# EAGLE board NE602-Upconverter (EAGLE 7.7.0)
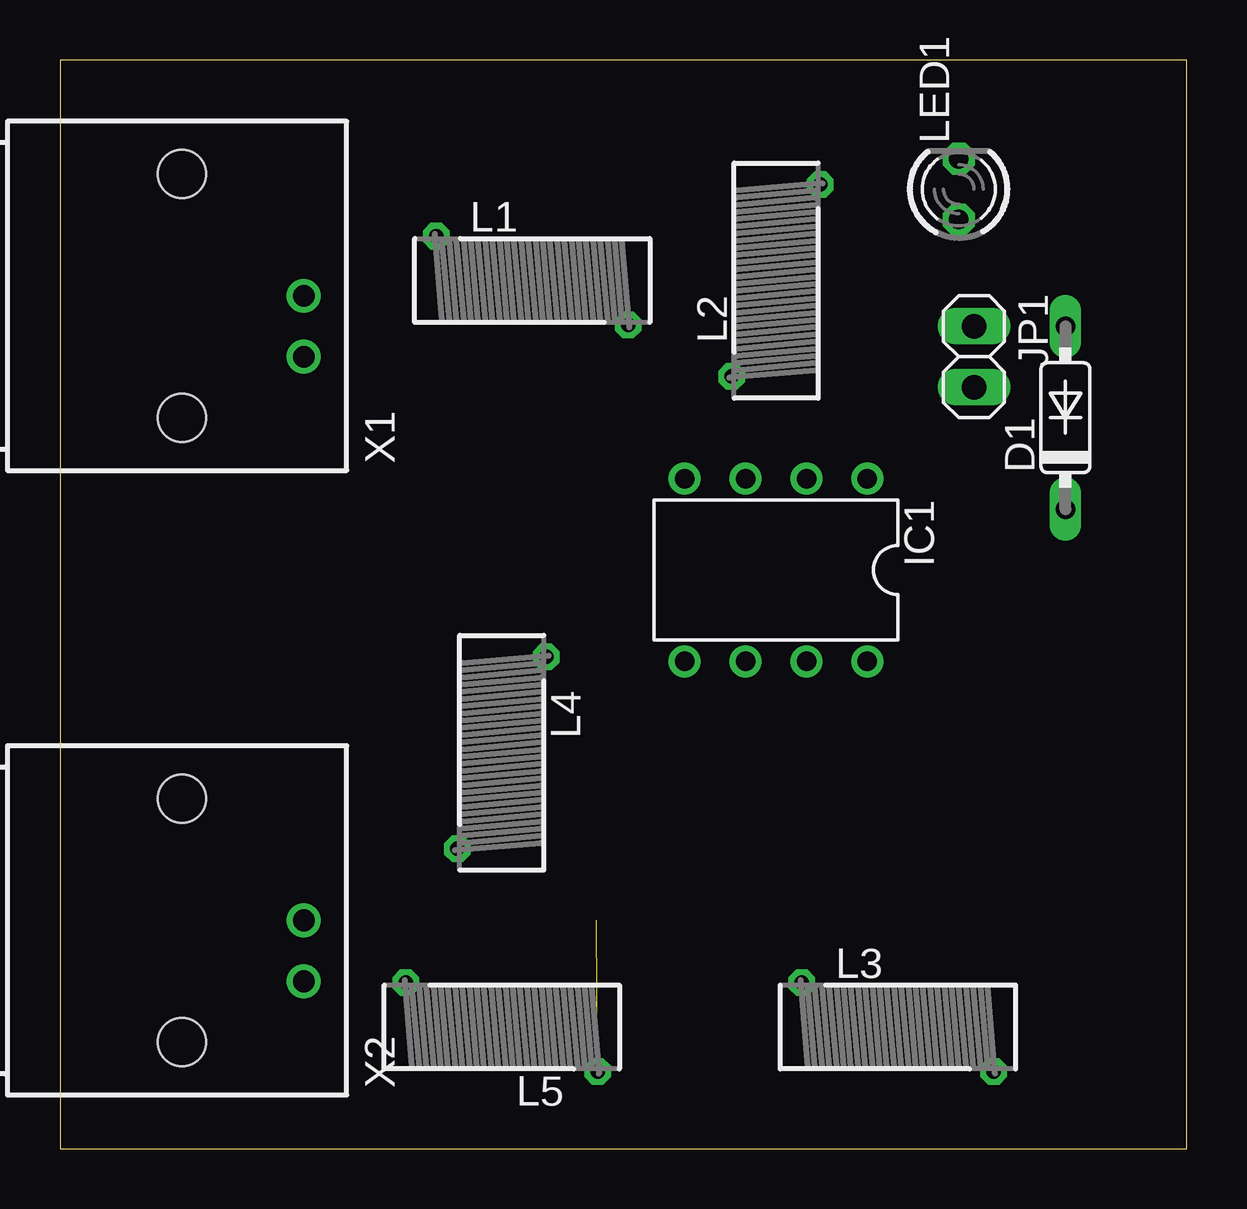
[diagram p0: board, top side]
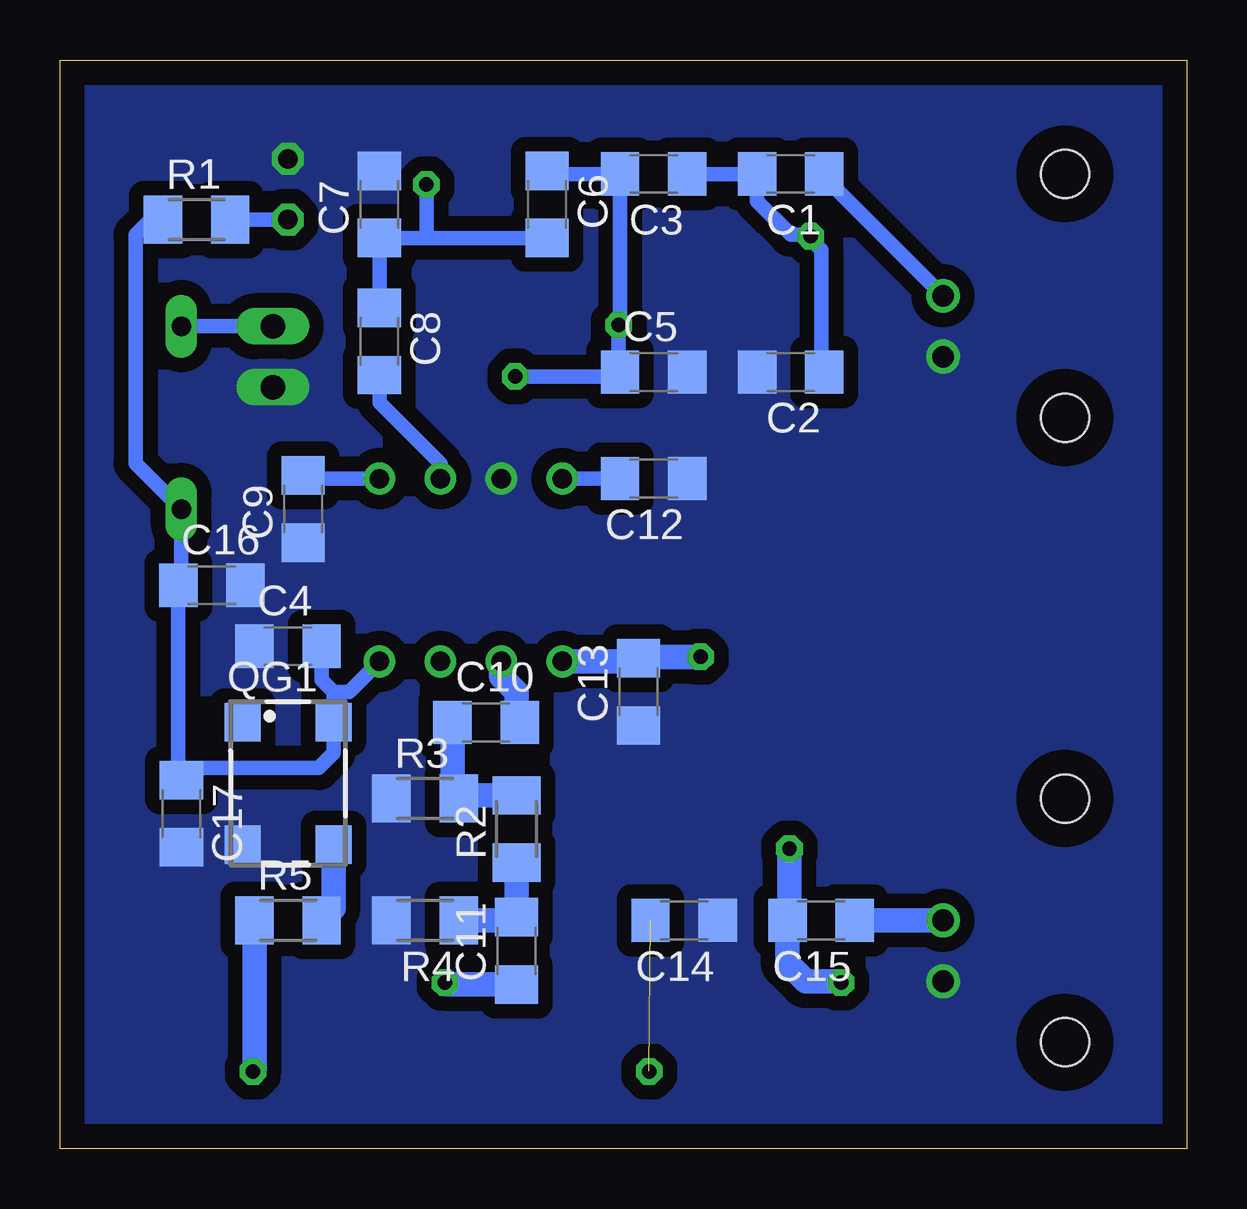
[diagram p1: board, bottom side, seen from below]

Size 46.97 x 45.39 mm. Coordinates in mm from the lower left corner, seen from the top.
Outline: 0,0 46.97,0 46.97,45.39 0,45.39 0,0
Copper layers (1*16): Top 0.035mm / dielectric 1.5mm / Bottom 0.035mm
Design rules "default": minimum track width 10mil, minimum drill 24mil, track to track 8mil, track to pad 8mil, pad to pad 8mil, via to via 8mil, smd to smd 8mil, copper to edge 40mil, drill to drill 8mil, minimum pad ring 10mil, minimum via ring 8mil, stop-mask expansion 4mil, vias tented up to drill 0mil, thermal gap 10mil

## Footprints (pad centres in the part's own frame; a part is rotated, then mirrored left to right if it is on the bottom)
C1206 = smd 1.6 x 1.8: 1 -1.4,0; 2 1.4,0
DO35-7 = drill 0.813 long: A 3.81,0; C -3.81,0
DIL08 = drill 0.813 pad 1.27: 1 -3.81,-3.81; 2 -1.27,-3.81; 3 1.27,-3.81; 4 3.81,-3.81; 5 3.81,3.81; 6 1.27,3.81; 7 -1.27,3.81; 8 -3.81,3.81
1X02 = drill 1.016 long: 1 -1.27,0; 2 1.27,0
Z28/7 = drill 0.6 octagon: 1 4,-1.85; 2 -4,1.85
LED3MM = drill 0.813 octagon: A -1.27,0; K 1.27,0
SM77H = smd 1.6 x 1.5: 1 -2.55,-1.9; 2 2.55,-1.9; 3 2.55,1.9; 4 -2.55,1.9
M1206 = smd 1.6 x 2: 1 -1.4,0; 2 1.4,0
AMP_227161 = drill 0.9 pad 1.27: 1 0,-5.08; 2 -2.54,-5.08 | hole 2: -5.08,0; 5.08,0

## Placement (x,y rotation side)
C1  [C1206]  16.51,40.64 180 bottom
C2  [C1206]  16.51,32.39 180 bottom
C3  [C1206]  22.23,40.64 180 bottom
C4  [C1206]  37.47,20.95 0 bottom
C5  [C1206]  22.23,32.39 0 bottom
C6  [C1206]  26.67,39.37 270 bottom
C7  [C1206]  33.66,39.37 90 bottom
C8  [C1206]  33.66,33.66 270 bottom
C9  [C1206]  36.83,26.67 90 bottom
C10  [C1206]  29.21,17.78 0 bottom
C11  [C1206]  27.94,8.26 90 bottom
C12  [C1206]  22.23,27.94 180 bottom
C13  [C1206]  22.86,19.05 90 bottom
C14  [C1206]  20.95,9.53 180 bottom
C15  [C1206]  15.24,9.53 180 bottom
C16  [C1206]  40.64,23.5 0 bottom
C17  [C1206]  41.91,13.97 270 bottom
D1  1N4148DO35-7  [DO35-7]  41.91,30.48 90 top
IC1  SA612AN  [DIL08]  29.84,24.13 180 top
JP1  [1X02]  38.1,33.02 270 top
L1  [Z28/7]  19.68,36.2 0 top
L2  [Z28/7]  29.84,36.2 90 top
L3  [Z28/7]  34.92,5.08 0 top
L4  [Z28/7]  18.41,16.51 270 top
L5  [Z28/7]  18.41,5.08 180 top
LED1  [LED3MM]  37.47,40 90 top
QG1  SM77H  [SM77H]  37.47,15.24 270 bottom
R1  [M1206]  41.27,38.73 0 bottom
R2  [M1206]  27.94,13.34 90 bottom
R3  [M1206]  31.75,14.61 0 bottom
R4  [M1206]  31.75,9.53 180 bottom
R5  [M1206]  37.47,9.53 0 bottom
X1  1-227161-0  [AMP_227161]  5.08,35.56 90 top
X2  1-227161-0  [AMP_227161]  5.08,9.53 90 top

## Library data of the parts
C1-C17 R1-R5 = rcl
D1 = diode
IC1 = linear
JP1 = pinhead
L1-L5 = inductor-neosid; OC_FARNELL: unknown; OC_NEWARK: unknown
LED1 = led
QG1 = crystal; OC_FARNELL: unknown; OC_NEWARK: unknown
X1 X2 = con-coax; MF: TYCO ELECTRONICS; MPN: 1-227161; OC_FARNELL: unknown; OC_NEWARK: 33B3200

## Nets
+5V: C4.2 C16.1 C17.1 D1.C IC1.8 QG1.4 R1.1
GND: C2.2 C4.1 C5.2 C7.2 C9.1 C12.1 C13.1 C14.1 C16.2 C17.2 IC1.3 JP1.2 LED1.K QG1.2 R3.1 R4.2 X1.2 X2.2
N$1: C1.2 C2.1 C3.1 L1.2
N$2: C3.2 C5.1 C6.1 L1.1 L2.2
N$3: C6.2 C7.1 C8.1 L2.1
N$4: C8.2 IC1.2
N$5: C9.2 IC1.1
N$6: C10.2 IC1.6
N$7: C14.2 L5.2
N$8: C13.2 IC1.5 L4.2
N$9: C15.2 L4.1 L5.1
N$10: C12.2 IC1.4
N$11: C11.2 R2.1 R4.1
N$12: C10.1 R2.2 R3.2
N$13: C11.1 L3.2
N$14: LED1.A R1.2
N$15: L3.1 R5.1
N$16: QG1.3 R5.2
N$18: C1.1 X1.1
N$19: C15.1 X2.1
N$20: D1.A JP1.1

## Tracks (layer width: path | path; a pad name or v marks a point on that pad's centre or on a via)
+5V
  Bottom 0.61: C4.2 36.06,19.55 35.56,19.05 | 35.56,19.05 QG1.4 | QG1.4 | IC1.8 34.92,19.05 35.56,19.05 | QG1.4 35.56,16.51 36.2,15.88 41.41,15.88 C17.1 42.04,15.5 C16.1 41.91,23.62 D1.C 43.81,28.58 43.81,38.1 43.18,38.73 R1.1
GND
  pour Bottom (isolate 0.61, no thermals): 0,45.09 46.99,45.09 46.99,0 0,0
N$1
  Bottom 0.61: C3.1 C1.2 17.91,39.5 16.51,38.1 15.74,38.1 L1.2 15.69,37.91 15.24,37.47 15.24,32.52 C2.1
N$2
  Bottom 0.61: C6.1 26.54,40.64 C3.2 23.62,34.41 L1.1 23.68,32.45 C5.1 23.82,32.2 L2.2
N$3
  Bottom 0.61: C6.2 31.75,37.97 | 31.75,37.97 C7.1 C8.1 | L2.1 31.7,38.03 31.75,37.97
N$4
  Bottom 0.61: C8.2 33.66,31.12 31.11,28.58 IC1.2
N$5
  Bottom 0.61: IC1.1 36.7,27.94 C9.2
N$6
  Bottom 1.016: IC1.6 28.57,19.69 27.94,19.05 27.94,17.91 C10.2
N$7  (1 unrouted)
N$8
  Bottom 1.016: IC1.5 22.99,20.32 C13.2 22.8,20.51 L4.2
N$9
  Bottom 1.016: L4.1 16.57,9.6 C15.2 16.64,7.75 15.88,6.98 14.47,6.98 L5.1
N$10
  Bottom 0.61: IC1.4 C12.2
N$11
  Bottom 1.016: R2.1 C11.2 28.07,9.53 R4.1
N$12
  Bottom 1.016: C10.1 30.61,14.87 R3.2 30.22,14.73 R2.2
N$13
  Bottom 1.016: C11.1 30.85,6.86 L3.2
N$14
  Bottom 0.61: R1.2 LED1.A
N$15
  Bottom 1.016: R5.1 38.87,3.29 L3.1
N$16
  Bottom 1.016: QG1.3 35.56,10.03 R5.2
N$18
  Bottom 0.61: C1.1 15.11,40.51 X1.1
N$19
  Bottom 1.016: C15.1 X2.1
N$20
  Bottom 0.61: JP1.1 D1.A